# Altium PCB LM2596Adj_AMS1117_pcb.PcbDoc
Units mm, origin at the board's own origin, x right, y up, seen from the top; angles counter-clockwise.
Board outline 43.43 x 44.83 mm, 2 copper layers (Top Layer, Bottom Layer); 11 components, 6 nets, 29 pads, 2 vias.
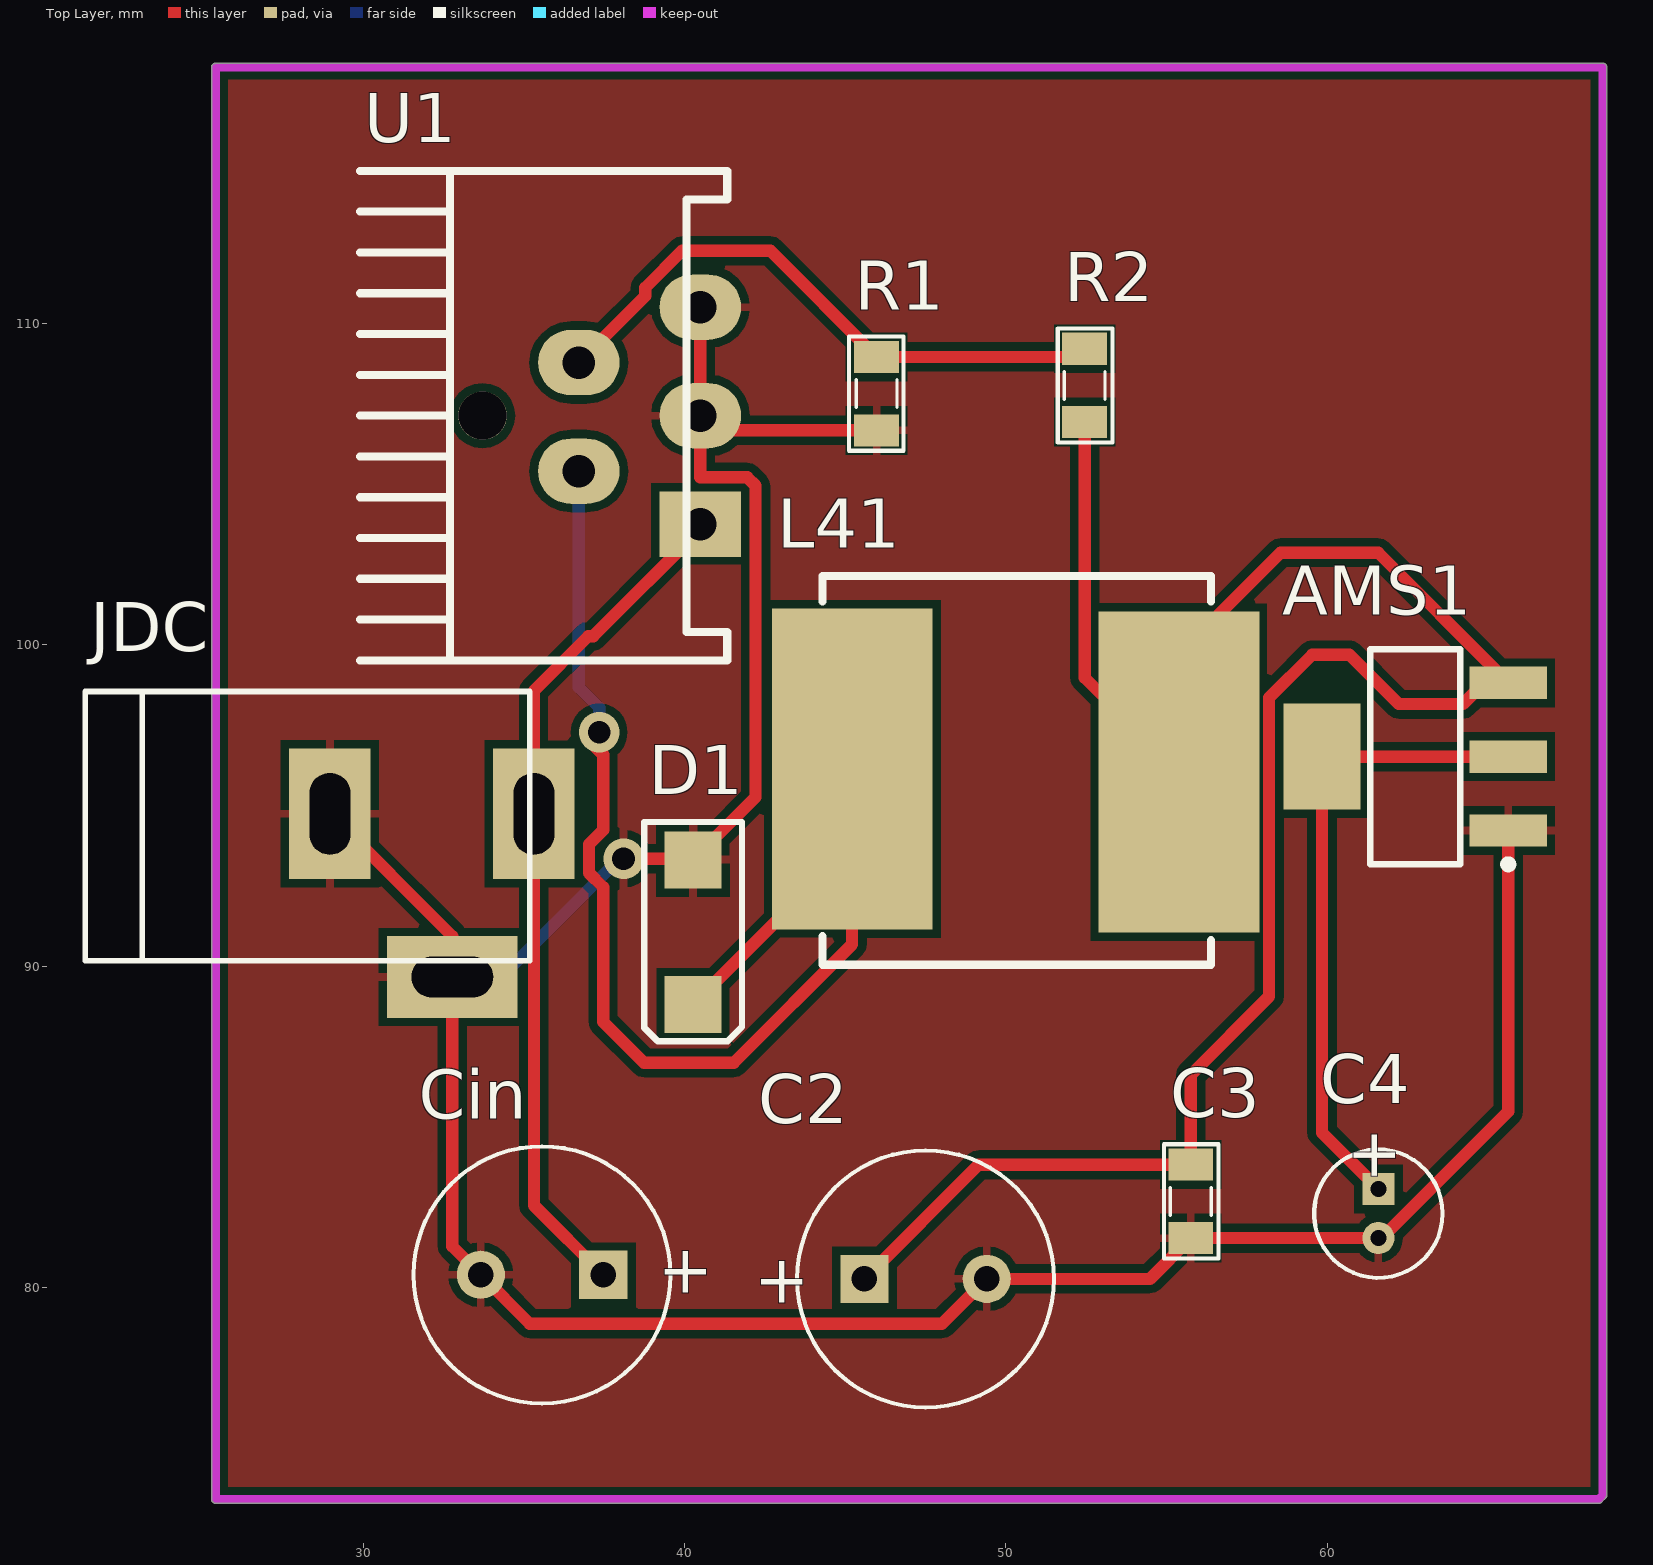
[diagram p0: Top Layer view]
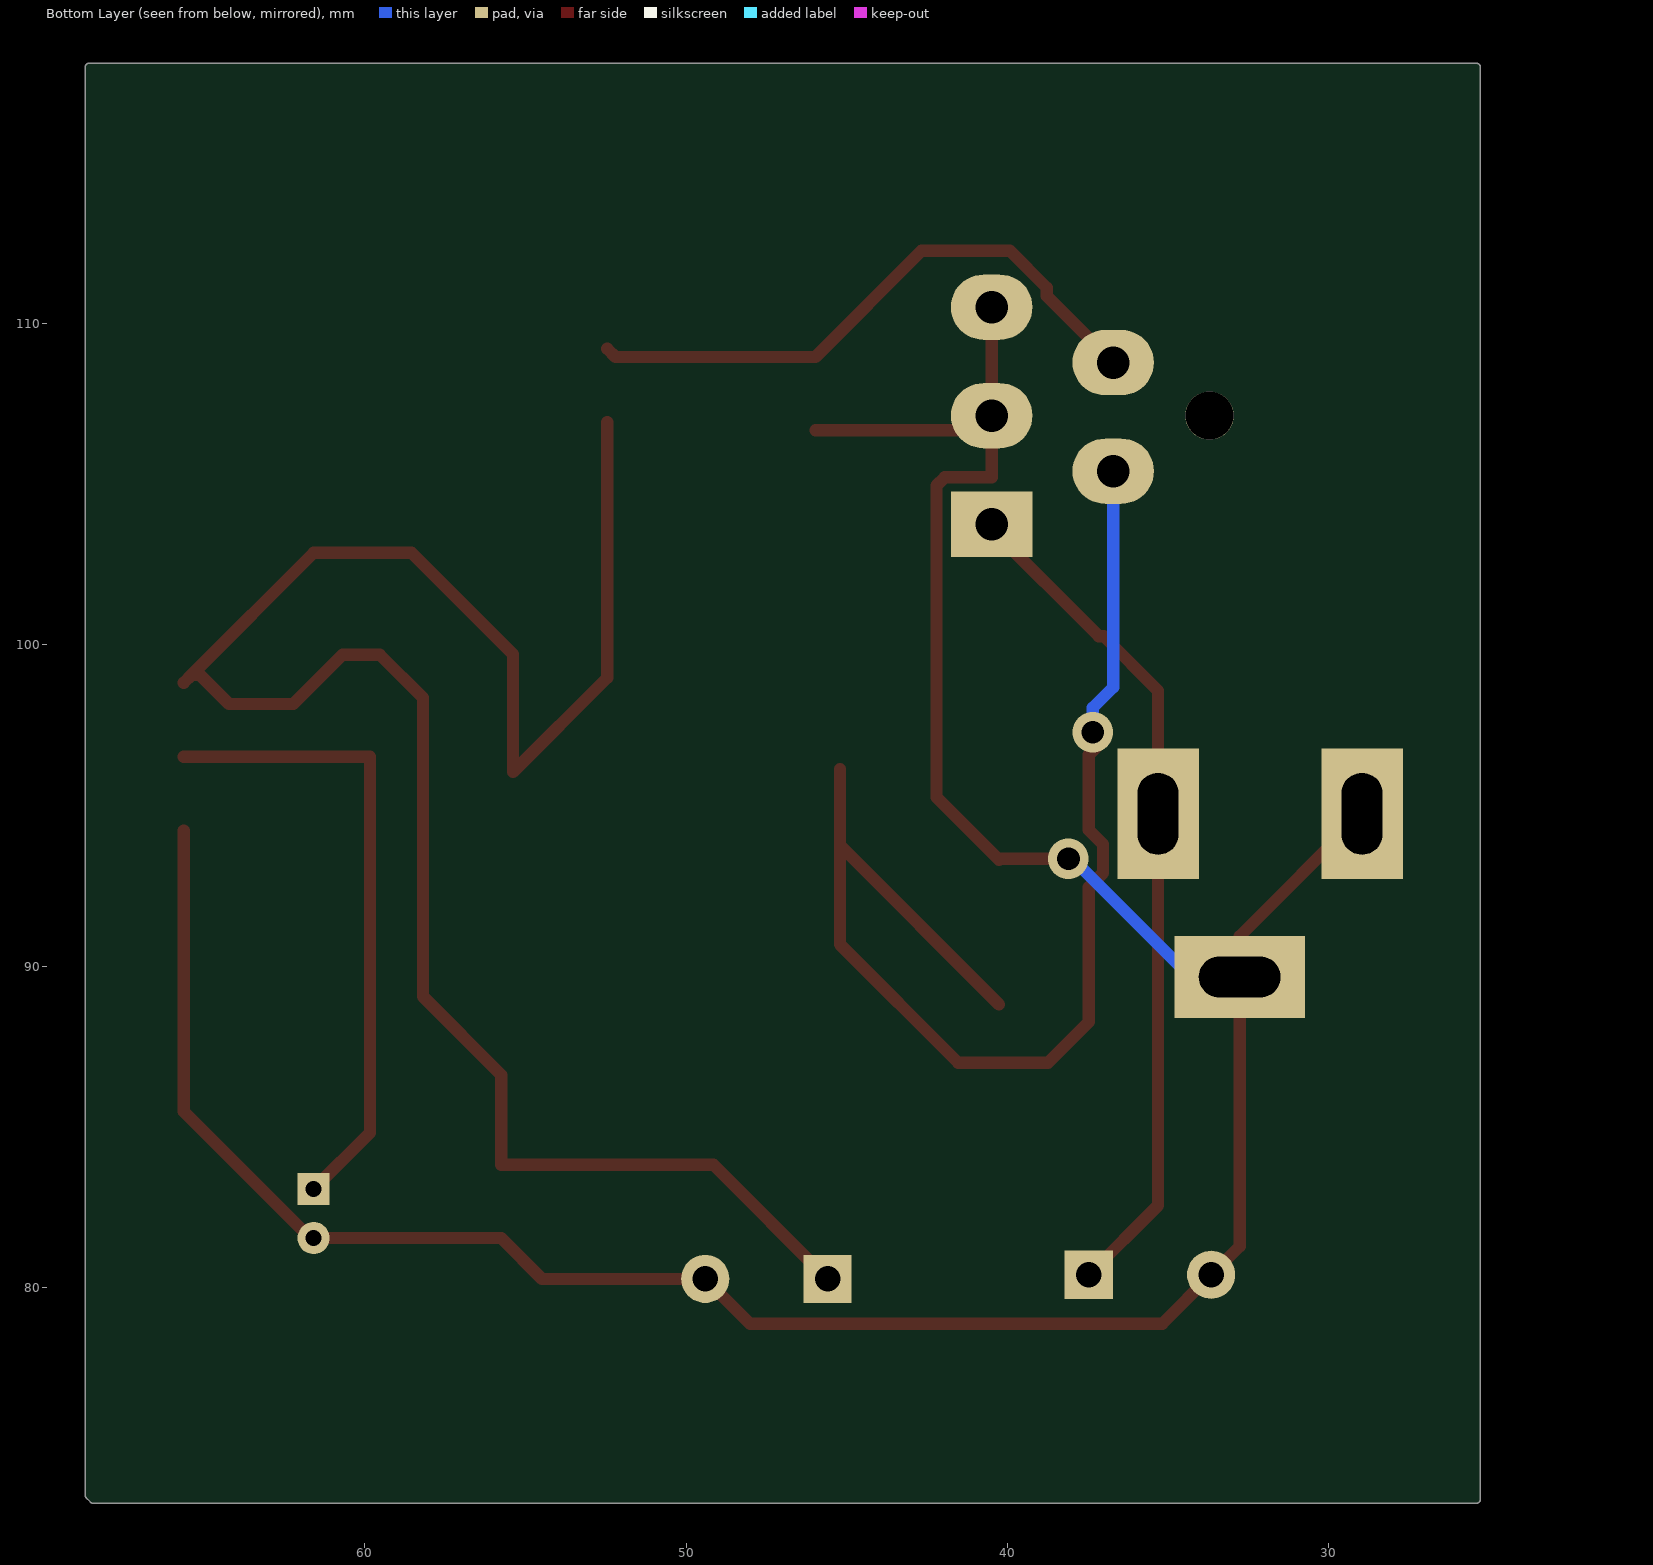
[diagram p1: Bottom Layer view, seen from below]
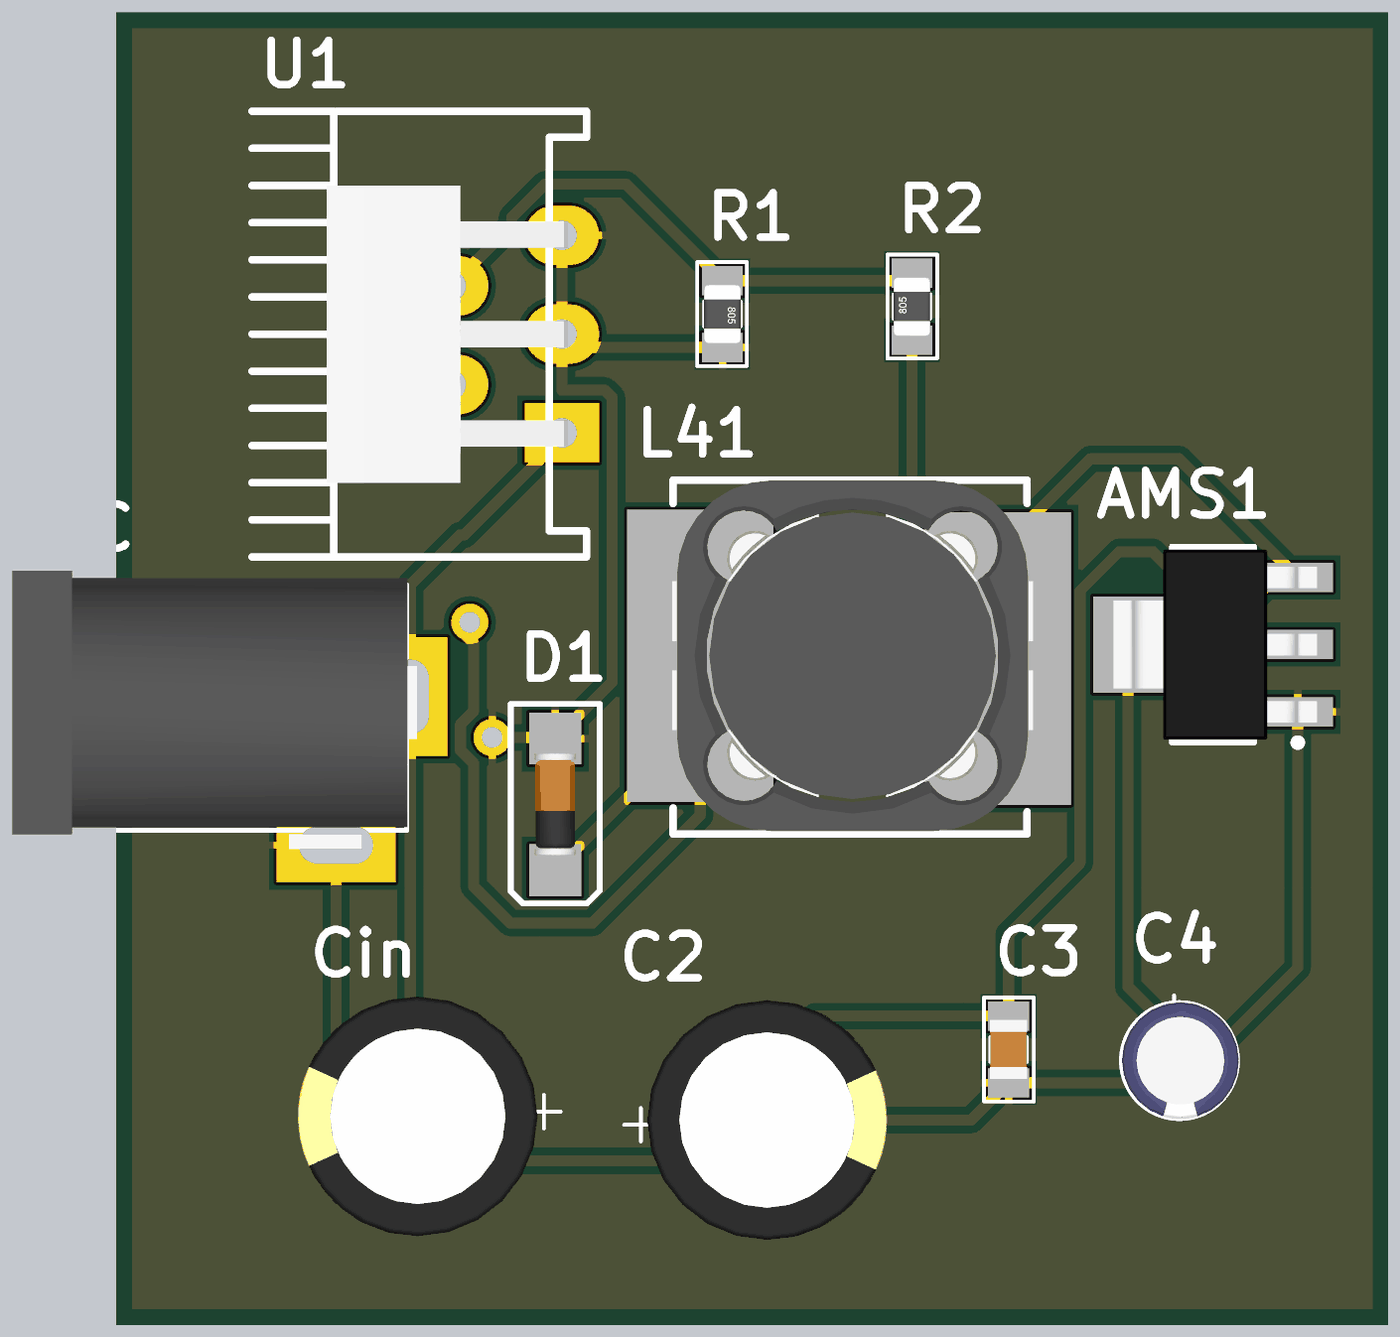
[diagram p2: 3D render of the assembled board from above, using the file's embedded part models]

## Layer stack, top to bottom
Top Solder: solder mask 0.0102, Solder Resist, Dk 3.5
Top Layer: signal copper 0.0356
Dielectric 1: dielectric 0.32, FR-4, Dk 4.8
Bottom Layer: signal copper 0.0356
Bottom Solder: solder mask 0.0102, Solder Resist, Dk 3.5

## Board outline
25.4,73.279 cw(c25.4,73.406) 25.273,73.406 25.273,117.983 cw(c25.4,117.983) 25.4,118.11 68.58,118.11 cw(c68.58,117.983) 68.707,117.983 68.707,73.533 cw(c68.58,73.533) 68.67,73.442 68.67,73.443 68.543,73.316 68.544,73.316 cw(c68.453,73.406) 68.453,73.279

## Design rules (kind name [scope] priority, off if disabled: settings)
Clearance [All] p1: gap=0.254 ignorepadtopadclearanceinfootprint=TRUE
PolygonConnect [All] p1: connectstyle=Relief reliefconductorwidth=0.254 reliefentries=4 polygonreliefangle="90 Angle" airgapwidth=0.254
RoutingVias [All] p1: holewidth=0.711 width=1.27 viastyle="Through Hole" minholewidth=0.711 minwidth=1.27 maxholewidth=0.711 maxwidth=1.27
SolderMaskExpansion [All] p1: expansion=0.102
Width [All] p1: maxlimit=1.27 minlimit=0.381 preferedwidth=0.762 minimp=50.000000 maximp=50.000000 favimp=50.000000
30 further rules are at their usual default settings.

## Classes and differential pairs
component class "LM2596 Adjustable_AMS1117": AMS1 C2 C3 Cin D1 JDC L41 R1 R2 U1

## Components (designator, comment, footprint, x,y, rotation, side; value= is the part's Value field where it differs from the comment)
AMS1 "AMS1117-3.3V" SOT223 62.738,96.52 r90 top value="AMS1117-3.3V SOT223"
C2 "470uF-25V" CA-ALU-8 47.498,80.264 r0 top value=104
C3 "10uF" CAP_0805 55.753,82.677 r90 top value=33p
C4 "10uF" CA-ALU-4 61.595,82.296 r270 top value=104
Cin "680uF-20V" CA-ALU-8 35.56,80.391 r180 top value=104
D1 "Diode Schottky" DIODE_ZENER_SMD 40.259,91.059 r270 top
JDC "Jac DC" DC-IN 32.131,92.202 r0 top
L41 "22uH" Inductor_SMD 56.388,90.043 r90 top value="150 mH"
R1 "1k" RES-SMD-0805 45.974,107.823 r270 top
R2 "3065" RES_SMD_0805 52.451,108.077 r90 top
U1 "LM2976" LM2576t 36.246,107.112 r90 top

## Footprints (in the part's own frame and the unit in brackets; to place one, negate y for a bottom-side part, rotate by r counter-clockwise, add the part's x,y. Pads: shape width x height; smd on the part's side, far side on the other; paste and mask are expansions set on the pad)
CA-ALU-4 [mm] "Polarized capacitors, Aluminum Electrolytic Capacitors, 2-Leads, Body 5x11x2x0.5"
  rect 1x1 hole 0.5: 1(-0.762,0)
  round 1 hole 0.5: 2(0.762,0)
  silkscreen extent -2,-2 2,2, body extent -2,-1.97 2,2.03, height 7.5
CA-ALU-8 [mm] "Polarized capacitors, Aluminum Electrolytic Capacitors, 2-Leads, Body 8x16x3.5x0.5"
  rect 1.5x1.5 hole 0.8: 1(-1.905,0)
  round 1.5 hole 0.8: 2(1.905,0)
  silkscreen extent -4,-4 4,4, body extent -4.1,-4.1 4.1,4.1, height 14.4
CAP_0805 [mil]
  rect 39.37x55 smd: 1(-45,0) 2(45,0)
  silkscreen extent -70,-34 70,33, body extent -40,-25 40,25, height 24
DC-IN [mil] "Jac DC input"
  rect 100x160 hole 50 slot 100 at 90 deg: 1(125,100) 2(-125,100)
  rect 160x100 hole 50 slot 100 at 0 deg: 3(25,-100)
  silkscreen extent -425,-80 120,250, body extent -410,-105 134,269, height 434
DIODE_ZENER_SMD [mil]
  rect 70x70 smd: 1(-88.58,0) 2(88.58,0)
  silkscreen extent -135,-60 134,60, body extent -69,-29 69,29, height 57
Inductor_SMD [mm]
  rect 10x5 smd: 1(6.096,11.176) 2(6,1)
  silkscreen extent 0,0 12.1,12.1, body extent 0.1,-0.2 12.1,12.14, height 7.15
LM2576t [mil]
  rect 80x100 hole 40: 1(-132,-167.09)
  oval 80x100 hole 40: 2(-67,-18) 3(1,-167) 4(66,-18) 5(134,-167)
  round 59.06 hole 59.06: ""(1,100)
  silkscreen extent -299,-200 301,250, body extent -199,-175 201,150, height 859
RES-SMD-0805 [mil]
  rect 39.37x55 smd: 1(-45,0) 2(45,0)
  silkscreen extent -70,-34 70,33, body extent -39,-25 39,25, height 31
RES_SMD_0805 [mil]
  rect 39.37x55 smd: 1(-45,0) 2(45,0)
  silkscreen extent -70,-34 70,33, body extent -39,-25 39,25, height 31
SOT223 [mm]
  rect 1x2.4 smd: 1(-2.3,-2.9) 2(0,-2.9) 3(2.3,-2.9)
  rect 3.3x2.4 smd: 4(0,2.9)
  silkscreen extent -3.47,-3.03 3.35,1.4, body extent -3.25,-3.56 3.25,3.4, height 1.68

## Part data
AMS1: library part "AMS1117 SMD", "Dán", Chung_Loai=Dán, Don_Vi=Con, Ma_Hang=MH000596
C2 C4 Cin: library part CAP-ALU-DIP, "Capacitor (Semiconductor SIM Model)", LatestRevisionDate=17-Jul-2002, LatestRevisionNote="Re-released for DXP Platform.", PackageReference=C1206, Publisher="Altium Limited"
C3: library part CapSMD, "Capacitor", LatestRevisionDate=17-Jul-2002, LatestRevisionNote="Re-released for DXP Platform.", PackageReference=RAD-0.3, Published=8-Jun-2000, Publisher="Altium Limited"
D1: "Generic Diode Schottky"
JDC: library part DCIN, "Jac DC input"
L41: library part L1, "Inductor"
R1 R2: library part "Resistor - SMD", "Resistor SMD", Manufacturer="Generic Components", Class=Passive, Published=08/06/2000, Publisher="Altium Hobart Technology Centre"
U1: library part LM2596, Max Input Voltage="12 V", Max Output Current="3 (6.0 peak) A", Max Output Voltage=mV, Temperature Range="-40 to +125 degC", Category=IC-Power, Min Input Voltage=mV, Min Output Voltage=mV, Mounting Technology="Surface Mount", Status=Unreleased, Supply Voltage=mV

## Via types
v1: diameter 1.27, hole 0.711, Top Layer to Bottom Layer, 2 vias

## Nets (pads, with @x,y where several pads share a name; then routed paths per layer and width w, separated by ;. In a path a pad name is that pad's centre, name@x,y a point inside that pad or via, vN(x,y) a via of type N, cw(c..) or ccw(c..) an arc to the next point about the centre after c; other vN are vias at no path point)
+3.3V: AMS1.2 AMS1.4 C4.1 | length 20
  Top Layer w0.381: C4.1 59.838,84.815 AMS1.4 AMS1.2
+5: AMS1.3 C2.1 C3.2 L41.2 R2.1 | length 65
  Top Layer w0.381: C2.1 49.149,83.82 C3.2 55.753,86.614 58.193,89.054 58.193,98.354 59.534,99.695 60.691,99.695 62.23,98.156 64.233,98.156 65.136,99.06 AMS1.3@65.398,99.06 ; R2.1 52.451,98.98 L41.2 55.388,99.711 58.547,102.87 61.588,102.87 AMS1.3@65.398,99.06 ; AMS1.3 AMS1.3@65.398,99.06
GND: AMS1.1 C2.2 C3.1 C4.2 Cin.2 D1.1 JDC.2 JDC.3 R1.2 U1.3 U1.5 | length 94.7
  Top Layer w0.381: JDC.2 32.766,90.932 JDC.3 32.766,81.28 Cin.2 35.179,78.867 48.006,78.867 C2.2 54.483,80.264 C3.1 C4.2 61.7,81.534 65.638,85.472 AMS1.1 ; v1(38.1,93.345) 40.223,93.345 D1.1 42.204,95.254 42.204,104.959 41.944,105.219 40.488,105.219 U1.3 ; U1.5 U1.3 ; R1.2 40.945,106.68 U1.3
  Bottom Layer w0.381: JDC.3 34.29,89.662 37.973,93.345 v1(38.1,93.345)
NetCin_1: Cin.1 JDC.1 U1.1 | length 26.5
  Top Layer w0.381: Cin.1 35.306,82.55 JDC.1 35.306,98.575 36.997,100.266 37.15,100.266 40.49,103.606 U1.1
NetD1_2: D1.2 L41.1 U1.2 | length 40.5
  Top Layer w0.381: v1(37.338,97.282) 37.268,97.282 37.071,97.085 36.957,97.085 37.465,96.577 37.465,94.237 37.02,93.792 37.02,92.898 37.465,92.453 37.465,88.265 38.735,86.995 41.529,86.995 45.212,90.678 L41.1@45.212,93.762 ; D1.2 L41.1@45.212,93.762 ; L41.1 L41.1@45.212,93.762
  Bottom Layer w0.381: U1.2 36.703,98.679 37.338,98.044 v1(37.338,97.282)
NetR1_1: R1.1 R2.2 U1.4 | length 18.8
  Top Layer w0.381: U1.4 38.773,110.858 38.773,111.12 39.921,112.268 42.672,112.268 R1.1 52.197,108.966 R2.2
pads on no net: U1.

## Polygon pours and split planes (outlines as drawn)
GND on Top Layer (solid, pour order 4): 25.4,117.983 68.58,117.983 68.58,73.533 68.453,73.406 25.4,73.406
no net on Top Layer (solid, pour order 2): 25.4,117.983

## Keep-outs
Top Layer:
  lines w0.254: 25.4,73.406 25.4,117.983 68.58,117.983 68.58,73.533 68.453,73.406 25.4,73.406

## Text inside footprints (layer, text, board x,y; h text height)
C2: Top Overlay "+" at 42.173,79.527 h1.5
C4: Top Overlay "+" at 60.833,84.963 h1.5 r270
Cin: Top Overlay "+" at 40.885,81.128 h1.5 r180